# Altium PCB gokart_pcb.PcbDoc
Units mm, origin at the board's own origin, x right, y up, seen from the top; angles counter-clockwise.
Board outline 90 x 66 mm, 2 copper layers (Top Layer, Bottom Layer); 70 components, 37 nets, 174 pads, 0 vias.
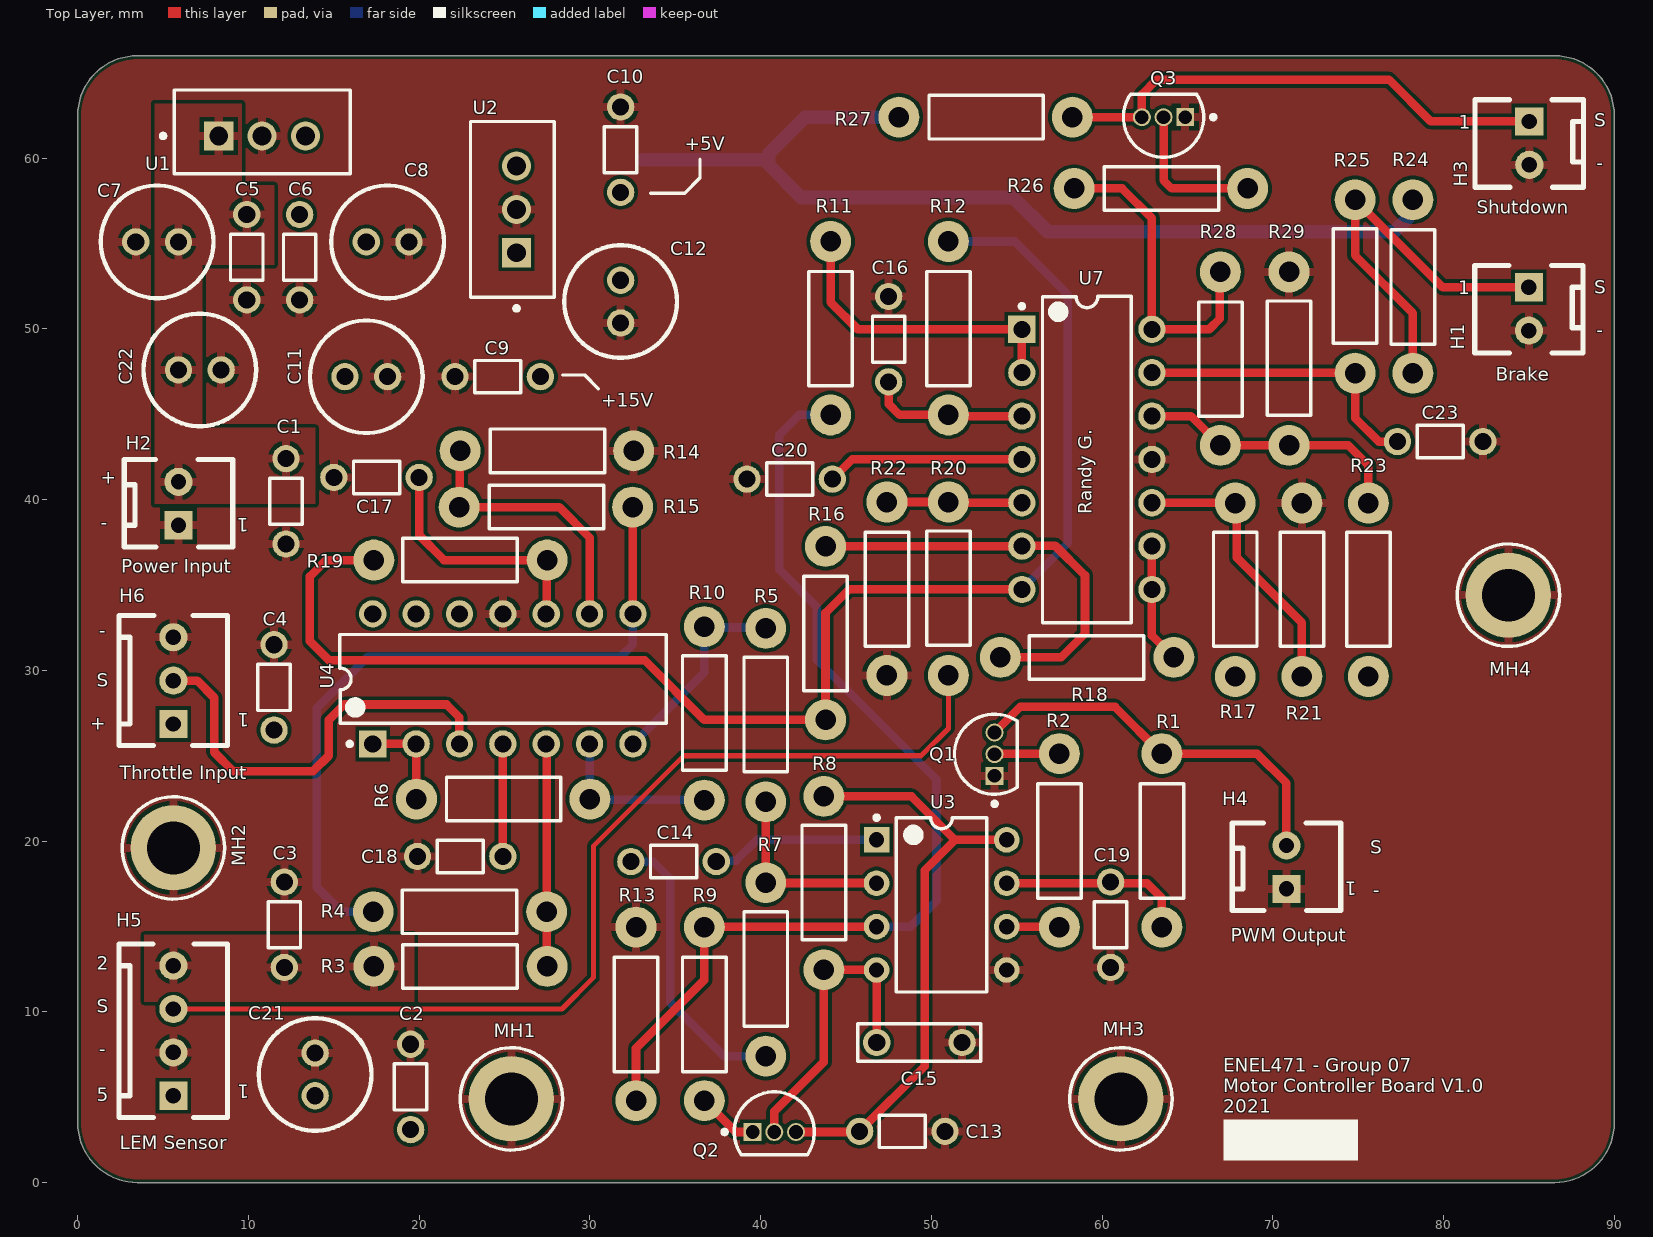
[diagram p0: Top Layer view]
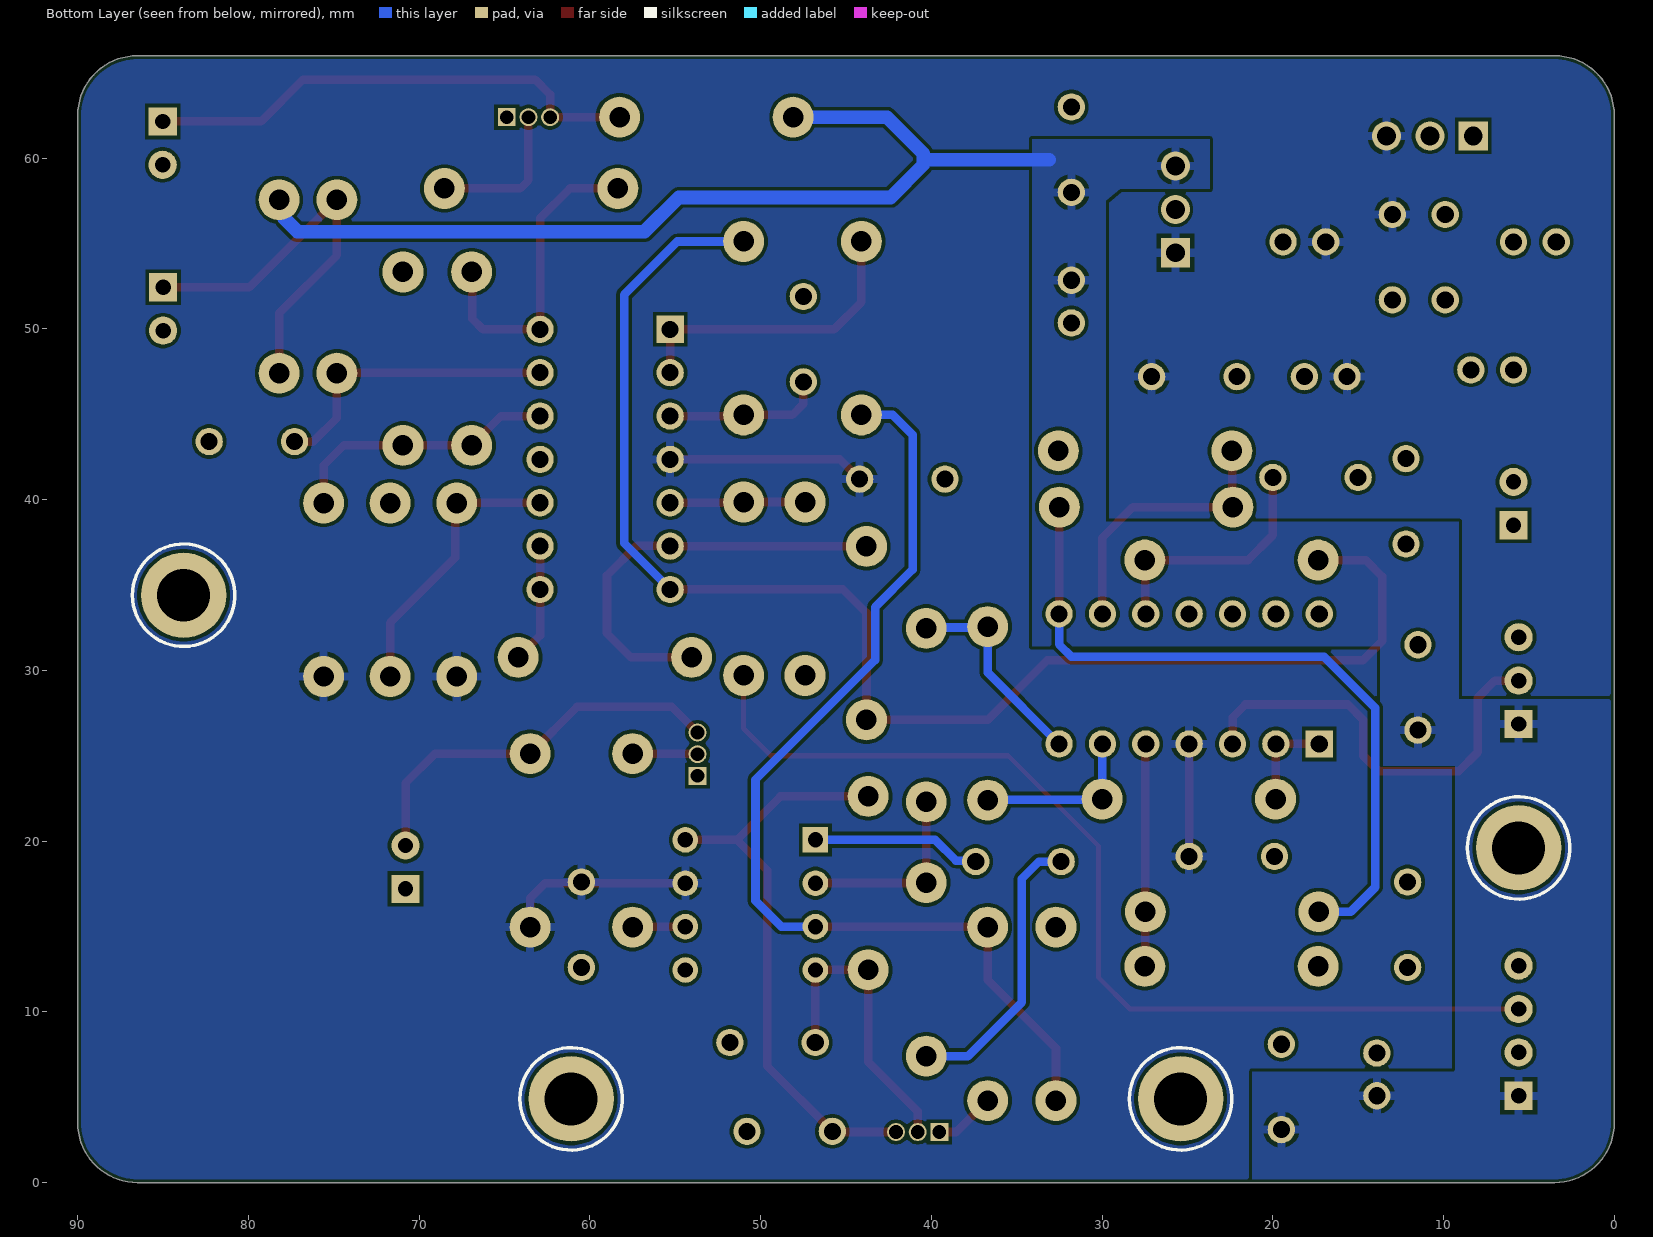
[diagram p1: Bottom Layer view, seen from below]
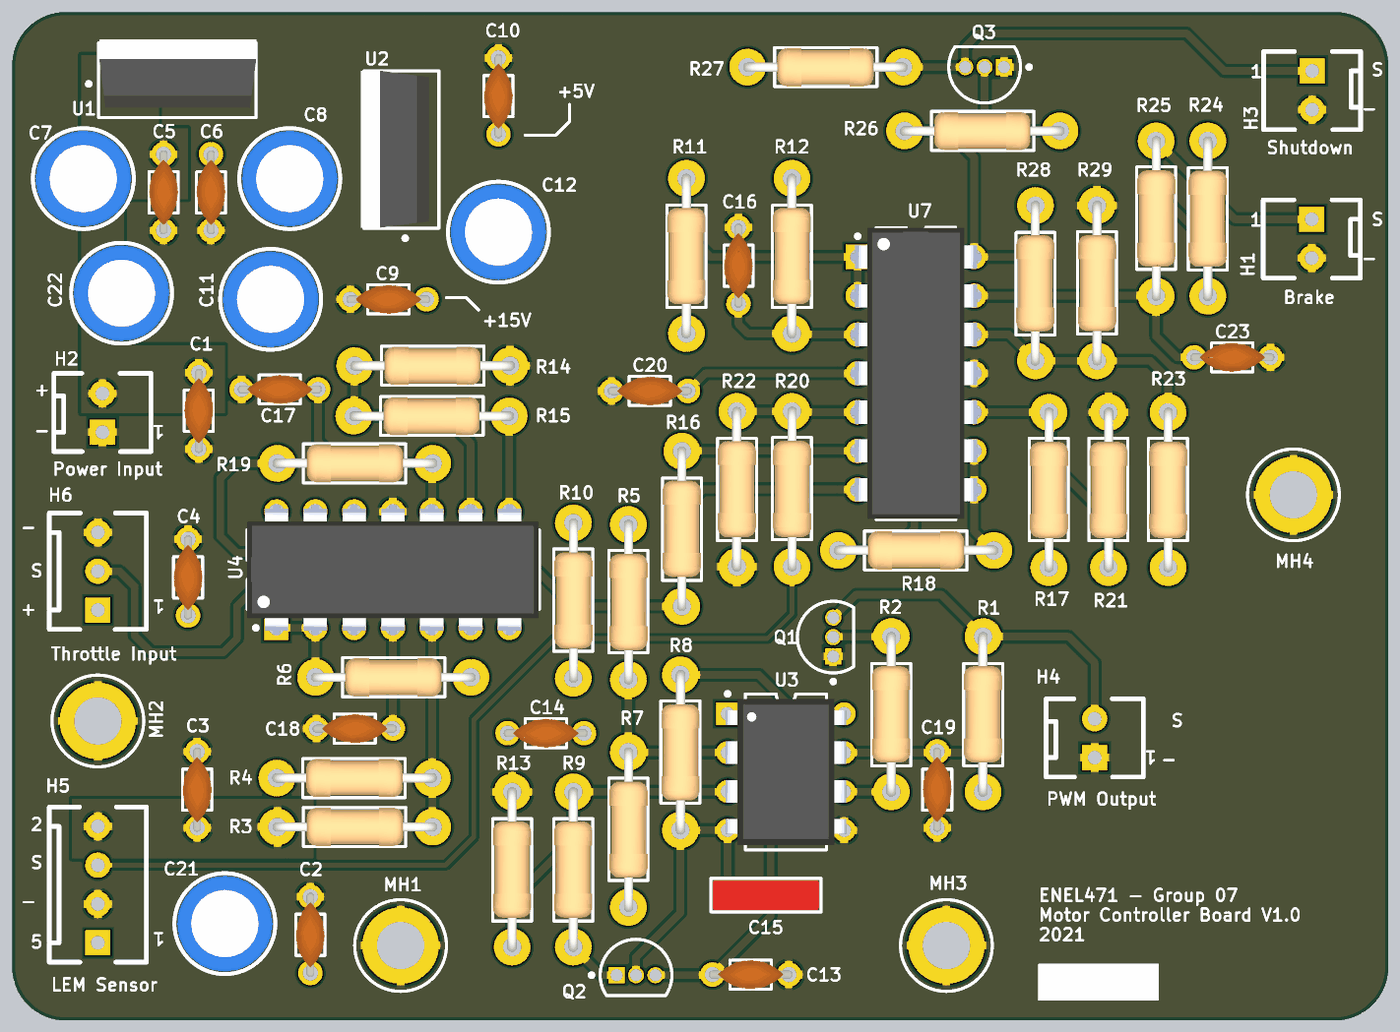
[diagram p2: 3D render of the assembled board from above, using the file's embedded part models]

## Layer stack, top to bottom
Top Solder: solder mask 0.0102, Solder Resist, Dk 3.5
Top Layer: signal copper 0.0356
Dielectric 1: dielectric 0.32, FR-4, Dk 4.8
Bottom Layer: signal copper 0.0356
Bottom Solder: solder mask 0.0102, Solder Resist, Dk 3.5

## Board outline
0,3.5 0,62.5 -0.001,62.5 cw(c3.5,62.5) 3.5,66.001 3.5,66 86.5,66 86.5,66.001 cw(c86.5,62.5) 90.001,62.5 90,62.5 90,3.5 90.001,3.5 cw(c86.5,3.5) 86.5,-0.001 86.5,0 3.5,0 3.5,-0.001 cw(c3.5,3.5)

## Design rules (kind name [scope] priority, off if disabled: settings)
BoardOutlineClearance [All] p1: gap=0.2 ignorepadtopadclearanceinfootprint=FALSE except(0.4: Arc-SplitBarrior Arc-SplitContinuation Track-SplitBarrior Track-SplitContinuation SMDPad-SplitBarrior SMDPad-SplitContinuation THPad-SplitBarrior THPad-SplitContinuation Via-SplitBarrior Via-SplitContinuation Fill-SplitBarrior Fill-SplitContinuation Poly-SplitBarrior Poly-SplitContinuation Region-SplitBarrior Region-SplitContinuation Text-SplitBarrior Text-SplitContinuation)
Clearance "Clearance Bottom Layer" [OnLayer('Bottom Layer')] p1: gap=0.203 ignorepadtopadclearanceinfootprint=TRUE except(0.254: Arc-Text Track-Text SMDPad-Text THPad-Text Via-Text Fill-Text Poly-Text Region-Text Text-Text)
Clearance "Clearance Top Layer" [OnLayer('Top Layer')] p2: gap=0.203 ignorepadtopadclearanceinfootprint=TRUE except(0.254: Arc-Text Track-Text SMDPad-Text THPad-Text Via-Text Fill-Text Poly-Text Region-Text Text-Text)
Clearance [All] p3: gap=0.2 ignorepadtopadclearanceinfootprint=FALSE except(0.089: Arc-Arc Arc-Track Arc-SMDPad Track-Track Track-SMDPad SMDPad-SMDPad; 0.127: Arc-Via Track-Via SMDPad-Via THPad-Via Via-Via; 0.254: Arc-Text Track-Text SMDPad-Text THPad-Text Via-Text Fill-Text Poly-Text Region-Text Text-Text)
HoleSize [All] p1: absolutevalues=TRUE maxlimit=6.3 minlimit=0.2 maxpercent=80.000 minpercent=20.000
MinimumAnnularRing [All] p1: minimumring=0.076
MinimumSolderMaskSliver [All] p1: minsoldermaskwidth=0.1
PolygonConnect [All] p1: connectstyle=Relief reliefconductorwidth=0.5 reliefentries=4 polygonreliefangle="90 Angle" airgapwidth=0.254
RoutingCorners [All] p1: cornerstyle=Round minsetback=2.54 maxsetback=2.54
RoutingVias [All] p1: holewidth=0.5 width=1 viastyle="Through Hole" minholewidth=0.2 minwidth=0.45 maxholewidth=1 maxwidth=2
SilkToSilkClearance [All] p1: silktosilkclearance=0.1
SilkToSolderMaskClearance [IsPad] p1: minsilkscreentomaskgap=0.1 clearancetoexposedcopper=TRUE
SolderMaskExpansion [All] p1: expansion=0.102 istentingtop=FALSE
Width [All] p1: maxlimit=2.54 minlimit=0.089 preferedwidth=0.381
25 further rules are at their usual default settings.

## Classes and differential pairs
component class U_power: C5 C6 C7 C8 C9 C10 C11 C12 U1 U2
component class U_controller: C13 C14 C15 C16 C17 C18 C19 C20 Q1 Q2 R1 R2 R3 R4 R5 R6 R7 R8 R9 R10 R11 R12 R13 R14 R15 R16 R17 R18 R19 R20 R21 R22 U3 U4 U7
component class gokart_top: C1 C2 C3 C4 C21 C22 C23 H1 H2 H3 H4 H5 H6 MH1 MH2 MH3 MH4 Q3 R23 R24 R25 R26 R27 R28 R29

## Components (designator, comment, footprint, x,y, rotation, side; value= is the part's Value field where it differs from the comment)
C1 "F" CAP_CER_2.50 12.2,39.9 r90 top
C2 "F" CAP_CER_2.50 19.5,5.6 r270 top
C3 "F" CAP_CER_2.50 12.1,15.1 r270 top
C4 "F" CAP_CER_2.50 11.5,29 r270 top
C5 "F" CAP_CER_2.50 9.9,54.2 r90 top
C6 "F" CAP_CER_2.50 13,54.2 r90 top
C7 "F" CAP_ELEC_2.50 4.65,55.1 r180 top
C8 "F" CAP_ELEC_2.50 18.15,55.1 r0 top
C9 "F" CAP_CER_2.50 24.6,47.2 r0 top
C10 "F" CAP_CER_2.50 31.8,60.5 r270 top
C11 "F" CAP_ELEC_2.50 16.9,47.2 r0 top
C12 "F" CAP_ELEC_2.50 31.8,51.6 r270 top
C13 "F" CAP_CER_2.50 48.3,3 r180 top
C14 "F" CAP_CER_2.50 34.9,18.8 r0 top
C15 "F" CAP_FILM_10.0 49.3,8.2 r180 top
C16 "F" CAP_CER_2.50 47.5,49.4 r270 top
C17 "F" CAP_CER_2.50 17.5,41.3 r0 top
C18 "F" CAP_CER_2.50 22.4,19.1 r0 top
C19 "F" CAP_CER_2.50 60.5,15.1 r90 top
C20 "F" CAP_CER_2.50 41.7,41.2 r0 top
C21 "F" CAP_ELEC_2.50 13.907,6.332 r90 top
C22 "F" CAP_ELEC_2.50 7.15,47.6 r0 top
C23 "F" CAP_CER_2.50 79.8,43.4 r180 top
H1 "2 Pin Molex KK HDR" MOLEX_KK_2_HDR 85,52.44 r270 top
H2 "2 Pin Molex KK HDR" MOLEX_KK_2_HDR 5.9,38.5 r90 top
H3 "2 Pin Molex KK HDR" MOLEX_KK_2_HDR 85.025,62.15 r270 top
H4 "2 Pin Molex KK HDR" MOLEX_KK_2_HDR 70.8,17.2 r90 top
H5 "4 Pin Molex KK Hdr" MOLEX_KK_4_HDR 5.6,5.08 r90 top
H6 "3 Pin Molex KK Hdr" MOLEX_KK_3_HDR 5.6,26.86 r90 top
MH1 "M3" M3-Mounting-Hole 25.4,4.9 r0 top
MH2 "M3" M3-Mounting-Hole 5.6,19.6 r0 top
MH3 "M3" M3-Mounting-Hole 61.1,4.9 r0 top
MH4 "M3" M3-Mounting-Hole 83.8,34.4 r0 top
Q1 "2N3904" ONSC-TO-92-3-29-04_AD 53.7,25.09 r90 top
Q2 "2N3904" ONSC-TO-92-3-29-04_AD 40.8,2.96 r0 top
Q3 "2N3904" ONSC-TO-92-3-29-04_AD 63.6,62.4 r180 top
R1 "k" RESISTOR_THROUGH_HOLE 63.5,14.96 r90 top
R2 "k" RESISTOR_THROUGH_HOLE 57.5,14.96 r90 top
R3 "k" RESISTOR_THROUGH_HOLE 17.34,12.66 r0 top
R4 "k" RESISTOR_THROUGH_HOLE 17.31,15.86 r0 top
R5 "k" RESISTOR_THROUGH_HOLE 40.3,32.46 r270 top
R6 "k" RESISTOR_THROUGH_HOLE 30,22.46 r180 top
R7 "k" RESISTOR_THROUGH_HOLE 40.3,17.56 r270 top
R8 "k" RESISTOR_THROUGH_HOLE 43.7,22.62 r270 top
R9 "k" RESISTOR_THROUGH_HOLE 36.7,4.8 r90 top
R10 "k" RESISTOR_THROUGH_HOLE 36.7,32.56 r270 top
R11 "k" RESISTOR_THROUGH_HOLE 44.1,44.96 r90 top
R12 "k" RESISTOR_THROUGH_HOLE 51,44.96 r90 top
R13 "k" RESISTOR_THROUGH_HOLE 32.7,4.8 r90 top
R14 "k" RESISTOR_THROUGH_HOLE 32.56,42.86 r180 top
R15 "k" RESISTOR_THROUGH_HOLE 32.5,39.56 r180 top
R16 "k" RESISTOR_THROUGH_HOLE 43.8,27.1 r90 top
R17 "k" RESISTOR_THROUGH_HOLE 67.8,39.8 r270 top
R18 "k" RESISTOR_THROUGH_HOLE 54.04,30.76 r0 top
R19 "k" RESISTOR_THROUGH_HOLE 17.34,36.46 r0 top
R20 "k" RESISTOR_THROUGH_HOLE 51,39.86 r270 top
R21 "k" RESISTOR_THROUGH_HOLE 71.7,39.8 r270 top
R22 "k" RESISTOR_THROUGH_HOLE 47.4,29.7 r90 top
R23 "k" RESISTOR_THROUGH_HOLE 75.6,39.8 r270 top
R24 "k" RESISTOR_THROUGH_HOLE 78.2,47.405 r90 top
R25 "k" RESISTOR_THROUGH_HOLE 74.82,57.565 r270 top
R26 "k" RESISTOR_THROUGH_HOLE 68.525,58.225 r180 top
R27 "k" RESISTOR_THROUGH_HOLE 58.26,62.4 r180 top
R28 "k" RESISTOR_THROUGH_HOLE 66.925,43.175 r90 top
R29 "k" RESISTOR_THROUGH_HOLE 70.95,53.335 r270 top
U1 "LM7815" ONSC-TO-220-3-221A-09 10.8,61.3 r90 top
U2 "LM7805" ONSC-TO-220-3-221A-09 25.7,57 r180 top
U3 "UC3843N" UC3843N 50.6,16.26 r0 top
U4 "LMC6484" TI-J14 24.9,29.5 r90 top
U7 "LMC6484" TI-J14 59.11,42.355 r0 top

## Footprints (in the part's own frame and the unit in brackets; to place one, negate y for a bottom-side part, rotate by r counter-clockwise, add the part's x,y. Pads: shape width x height; smd on the part's side, far side on the other; paste and mask are expansions set on the pad)
CAP_CER_2.50 [mm]
  round 1.6 hole 1: 1(-2.5,0) 2(2.5,0)
  silkscreen extent -1.35,-0.95 1.35,0.95, body extent -2.75,-0.95 2.75,0.95, height 4.4
CAP_ELEC_2.50 [mm]
  round 1.6 hole 1: 1(-1.25,0) 2(1.25,0)
  silkscreen extent -3.3,-3.3 3.3,3.3, body extent -3.15,-3.15 3.15,3.15, height 7.1
CAP_FILM_10.0 [mm]
  round 1.6 hole 1: 1(-2.5,0) 2(2.5,0)
  silkscreen extent -3.6,-1.1 3.6,1.1, body extent -3.5,-1 3.5,1, height 10.01
M3-Mounting-Hole [mm]
  round 5 hole 3.1: 1(0,0)
  silkscreen extent -3,-3 3,3
MOLEX_KK_2_HDR [mil] "MOLEX_KK_2_HDR"
  rect 65x65 hole 35.43: 1(0,0)
  round 65 hole 35.43: 2(100,0)
  silkscreen extent -50,-125 152,125, body extent -44,-121 146,119, height 630
MOLEX_KK_3_HDR [mil] "MOLEX_KK_3_HDR"
  rect 65x65 hole 35.43: 1(0,0)
  round 65 hole 35.43: 2(100,0) 3(200,0)
  silkscreen extent -50,-125 250,125, body extent -44,-120 244,119, height 630
MOLEX_KK_4_HDR [mil] "MOLEX_KK_4_HDR"
  rect 65x65 hole 35.43: 1(0,0)
  round 65 hole 35.43: 2(100,0) 3(200,0) 4(300,0)
  silkscreen extent -50,-125 350,125, body extent -44,-119 343,119, height 630
ONSC-TO-92-3-29-04_AD [mm] "TO, 3-Leads, Body Dia 4.7mm, Pitch 1.27mm"
  rect 1.05x1.05 hole 0.8: 1(-1.27,0)
  round 1.05 hole 0.8: 2(0,0) 3(1.27,0)
  silkscreen extent -3.04,-1.34 2.35,2.35, body extent -2.36,-1.34 2.35,2.36, height 7.87
ONSC-TO-220-3-221A-09 [mm] "FM, 3-Leads, Body 10.3x4.85mm, Pitch 2.54mm"
  rect 1.7x1.7 hole 1.1: 1(0,2.54)
  round 1.7 hole 1.1: 2(0,0) 3(0,-2.54)
  silkscreen extent -2.2,-5.15 2.7,5.92, body extent -1.55,-5.16 2.9,5.11, height 19.16
RESISTOR_THROUGH_HOLE [mm]
  round 2.4 hole 1.2: 1(0,0) 2(10.16,0)
  silkscreen extent 1.7,-1.28 8.4,1.28, body extent -0.3,-1.24 10.45,1.25, height 2.5
TI-J14 [mm] "DIP, 14-Leads, Body 19.94x6.92mm, Row Spacing 7.62 mm, Pitch 2.54mm"
  rect 1.6x1.6 hole 1: 1(-3.81,7.62)
  round 1.6 hole 1: 2(-3.81,5.08) 3(-3.81,2.54) 4(-3.81,0) 5(-3.81,-2.54) 6(-3.81,-5.08) 7(-3.81,-7.62) 8(3.81,-7.62) 9(3.81,-5.08) 10(3.81,-2.54) 11(3.81,0) 12(3.81,2.54) 13(3.81,5.08) 14(3.81,7.62)
  silkscreen extent -3.93,-9.57 2.6,9.55, body extent -4.25,-9.52 4.25,9.53, height 5.43
UC3843N [mm] "DIP, 8-Leads, Row Spacing 7.62mm, Pitch 2.54mm, Body 9.6x6.4mm"
  rect 1.5x1.5 hole 0.9: 1(-3.81,3.81)
  round 1.5 hole 0.9: 2(-3.81,1.27) 3(-3.81,-1.27) 4(-3.81,-3.81) 5(3.81,-3.81) 6(3.81,-1.27) 7(3.81,1.27) 8(3.81,3.81)
  silkscreen extent -3.93,-5.1 2.65,5.23, body extent -3.94,-4.79 3.94,4.79, height 5.18

## Part data
C1 C2 C3 C4 C5 C6 C9 C10 C13 C14 C16 C17 C18 C19 C20 C23: library part CAP_CER
C7 C8 C11 C12 C21 C22: library part CAP_ELEC
C15: library part CAP_FILM
H1 H2 H3 H4: library part JA_MOLEX_KK_2POS, "CONN HEADER 2POS 2.54mm VERT_Thru Hole", Supplier Part Number 1=1462926, Storage Location="ECE Dept Store", Supplier="ECE Dept", Supplier 1=Farnell
H5: library part JA_MOLEX_KK_4POS, "CONN HEADER 4POS 2.54mm VERT_Thru Hole", Manufacturer=Molex, Manufacturer PN=22-23-2041, Supplier Part Number 1=9731164, Storage Location="ECE Dept Store", Supplier="ECE Dept", Supplier 1=Farnell
H6: library part JA_MOLEX_KK_3POS, "CONN HEADER 3POS 2.54mm VERT_Thru Hole", Manufacturer=Molex, Manufacturer PN=22-23-2031, Supplier Part Number 1=9731156, Storage Location="ECE Dept Store", Supplier="ECE Dept", Supplier 1=Farnell
MH1 MH2 MH3 MH4: library part M3-Mounting-Hole
R1 R2 R3 R4 R5 R6 R7 R8 R9 R10 R11 R12 R13 R14 R15 R16 R17 R18 R19 R20 R21 R22 R23 R24 R25 R26 R27 R28 R29: library part Resistor
U3: "PWM Controller with Current Control, 100 % Duty Cycle, 0 to +70 degC, 8-pin PDIP (P), Green (RoHS & no Sb/Br)", Frequency(Max)(kHz)=450, Manufacturer="Texas Instruments", Rating=Catalog, Supplier Part Number 1=296-11288-5-ND, Code_JEDEC=MS-001-BA, ComponentLink1Description=Datasheet, ComponentLink1URL=http://www.ti.com/general/docs/lit/getliterature.tsp?genericPartNumber=UC3843&fileType=pdf, Control Method=Current, DatasheetVersion=SLUS223C, Duty Cycle(Max)(%)=100, Eco-Plan="Green (RoHS & no Sb/Br)", Mounting Technology="Through Hole", PackageDescription="8-Pin Plastic Dual-In-Line Package, Row Spacing 7.62 mm, Pitch 2.54 mm", PackageReference=P8, PackageVersion="revE, Apr-2010", PartNumber=UC3843N, Regulated Outputs(#)=1, SubFamily="PWM Controller", Supplier 1=Digi-Key, Supplier 2=Farnell, Supplier 3=Newark, Supplier 4=Mouser, Supplier Part Number 2=2164381, Supplier Part Number 3=74K4014, Supplier Part Number 4=595-UC3843N, Topology="Boost, Buck, Flyback, Forward", UVLO Thresholds On/Off(V)=8.4/7.6
Q1 Q2 Q3: ComponentLink1Description="Manufacturer URL", ComponentLink1URL=http://www.onsemi.com/, ComponentLink2Description=Datasheet, ComponentLink2URL=http://www.onsemi.com/pub_link/Collateral/BC549B-D.PDF, ComponentLink3Description="Package Specification", ComponentLink3URL=http://www.onsemi.com/pub_link/Collateral/BC549B-D.PDF
U1 U2: ComponentLink1Description="Manufacturer URL", ComponentLink1URL=http://www.onsemi.com/, ComponentLink2Description=Datasheet, ComponentLink2URL=http://www.onsemi.com/pub_link/Collateral/NTD5862N-D.PDF, ComponentLink3Description="Package Specification", ComponentLink3URL=http://www.onsemi.com/pub_link/Collateral/221A-09.PDF
U4 U7: ComponentLink1Description="Manufacturer URL", ComponentLink1URL=http://www.ti.com/, ComponentLink2Description=Datasheet, ComponentLink2URL=http://www.ti.com/lit/ds/symlink/tl064m.pdf, ComponentLink3Description="Package Specification", ComponentLink3URL=http://www.ti.com/litv/pdf/mcer002d

## Nets (pads, with @x,y where several pads share a name; then routed paths per layer and width w, separated by ;. In a path a pad name is that pad's centre, name@x,y a point inside that pad or via, vN(x,y) a via of type N, cw(c..) or ccw(c..) an arc to the next point about the centre after c; other vN are vias at no path point)
2V5: C3.2 H5.4 R3.1
5V: C2.2 C4.2 C10.2 C12.1 C21.1 H5.1 H6.1 R24.2 R27.2 U2.3 | length 57.1
  Bottom Layer w0.8: 33.1,59.9 40.474,59.9 ; R27.2 42.6,62.4 40.474,60.274 40.474,59.611 42.384,57.7 54.8,57.7 56.8,55.7 77.134,55.7 77.894,56.46 77.894,57.259 R24.2
15V: C6.2 C8.1 C9.2 C11.1 C18.2 C19.2 C20.2 R1.1 R17.2 R23.2 U1.3 U2.1 U3.7 U4.4 U7.4 | length 29.1
  Top Layer w0.5: C18.2 U4.4@24.9,25.25 ; C20.2 45.355,42.355 U7.4 ; C20.2@44.25,41.16 C20.2@44.442,41.16 ; U3.7 62.63,17.53 63.5,16.66 R1.1
24V: C1.2 C5.2 C7.1 C22.1 H2.2 U1.1
GND: C1.1 C2.1 C3.1 C4.1 C5.1 C6.1 C7.2 C8.2 C9.1 C10.1 C11.2 C12.2 C13.1 C15.1 C16.1 C17.1 C18.1 C19.1 C20.1 C21.2 C22.2 C23.1 H1.2 H2.1 H3.2 H4.1 H5.2 H6.3 MH1.1 MH2.1 MH3.1 MH4.1 Q1.1 Q3.1 R13.2 R14.1 R21.1 R22.1 R29.1 U1.2 U2.2 U3.5 U4.11 U7.11
NetC14_1: C14.1 R7.2 | length 16.9
  Bottom Layer w0.5: C14.1 33.7,18.8 34.7,17.8 34.7,10.56 37.86,7.4 R7.2
NetC14_2: C14.2 U3.1 | length 9.9
  Bottom Layer w0.5: C14.2@37.4,18.86 38.56,18.86 39.77,20.07 U3.1
NetC16_2: C16.2 R12.1 U7.3 | length 9.5
  Top Layer w0.5: C16.2 47.5,45.6 48.14,44.96 R12.1 ; R12.1@50.95,45.01 51.065,44.895 U7.3
NetC17_2: C17.2 R19.2 U4.10 | length 15.1
  Top Layer w0.5: C17.2 20,37.91 21.45,36.46 R19.2 27.47,36.43 27.47,33.34 U4.10 U4.10@27.44,32.87
NetC23_2: C23.2 R25.2 U7.13 | length 17.6
  Top Layer w0.5: U7.13 74.79,47.435 R25.2 74.82,44.78 76.2,43.4 C23.2
NetH1_1: H1.1 R24.1 R25.1 | length 23.9
  Top Layer w0.5: R24.1 78.2,50.925 74.82,54.305 R25.1 79.945,52.44 H1.1
NetH3_1: H3.1 Q3.3 R27.1 | length 29.5
  Top Layer w0.5: R27.1 Q3.3 62.33,63.73 63.2,64.6 76.8,64.6 79.25,62.15 H3.1
NetQ1_2: Q1.2 R2.2 | length 3.8
  Top Layer w0.5: Q1.2 53.715,25.105 57.485,25.105 R2.2
NetQ2_1: Q2.1 R9.1 | length 3.6
  Top Layer w0.5: R9.1 38.54,2.96 Q2.1
NetQ3_2: Q3.2 R26.1 | length 8.8
  Top Layer w0.5: Q3.2 63.6,58.694 64.069,58.225 R26.1
NetR2_1: R2.1 U3.6 | length 3.2
  Top Layer w0.5: U3.6@54.31,14.99 U3.6 54.425,14.975 57.485,14.975 R2.1
NetR3_2: R3.2 R4.2 U4.5 | length 12.6
  Top Layer w0.5: U4.5@27.44,25.25 27.47,25.22 R4.2 27.485,15.845 27.485,12.675 R3.2
NetR4_1: R4.1 R15.1 U4.8 | length 42.5
  Top Layer w0.5: R15.1 32.51,39.55 32.51,33.32 U4.8
  Bottom Layer w0.5: R4.1 15.44,15.86 14,17.3 14,27.8 17,30.8 31.8,30.8 32.52,31.52 U4.8
NetR5_1: R5.1 R10.1 U4.7 | length 12.2
  Top Layer w0.5: R10.1 R10.1@36.75,32.51 ; R5.1@40.25,32.51 R5.1
  Bottom Layer w0.5: U4.7 36.7,29.87 R10.1 ; R10.1@36.75,32.51 R5.1@40.25,32.51
NetR5_2: R5.2 R7.1 U3.2 | length 11.1
  Top Layer w0.5: R5.2 R7.1 40.315,17.545 46.675,17.545 U3.2@46.69,17.53
NetR6_1: R6.1 R10.2 U4.6 | length 9.5
  Bottom Layer w0.5: U4.6@29.98,25.25 29.99,25.24 29.99,22.47 R6.1 30.03,22.43 36.67,22.43 R10.2
NetR6_2: R6.2 U4.1 U4.2 | length 5.3
  Top Layer w0.5: U4.1 U4.2 ; U4.2@19.82,25.25 19.83,25.24 19.83,22.47 R6.2
NetR9_2: R9.2 R11.1 R13.1 U3.3 | length 60.5
  Top Layer w0.5: R13.1 32.7,7.86 36.7,11.86 R9.2 36.715,14.975 46.675,14.975 U3.3@46.69,14.99
  Bottom Layer w0.5: R11.1 42.26,44.96 41.1,43.8 41.1,35.9 43.3,33.7 43.3,30.6 50.3,23.6 50.3,16.5 48.79,14.99 U3.3
NetR11_2: R11.2 U7.1 U7.2 | length 18
  Top Layer w0.5: R11.2 44.1,51.56 45.685,49.975 U7.1 U7.2
NetR12_2: R12.2 R16.1 R19.1 U7.7 | length 85
  Top Layer w0.5: R19.1 14.56,36.46 13.6,35.5 13.6,31.7 14.7,30.6 33.2,30.6 36.7,27.1 R16.1 43.8,33.36 45.2,34.76 U7.7@55.3,34.76
  Bottom Layer w0.5: R12.2 54.88,55.12 58,52 58,37.46 U7.7@55.3,34.76
NetR14_2: R14.2 R15.2 U4.9 | length 16.2
  Top Layer w0.5: R14.2 22.37,42.83 22.37,39.59 R15.2 28.2,39.56 29.98,37.78 U4.9
NetR16_2: R16.2 R18.1 U7.6 | length 24.9
  Top Layer w0.5: R16.2 43.82,37.28 55.28,37.28 55.3,37.3 57.26,37.3 59,35.56 59,32.16 57.6,30.76 R18.1
NetR17_1: R17.1 R21.2 U7.10 | length 16.7
  Top Layer w0.5: U7.10 62.928,39.807 67.792,39.807 R17.1 67.9,39.7 67.9,36.6 71.7,32.8 R21.2
NetR18_2: R18.2 U7.8 U7.9 | length 7
  Top Layer w0.5: U7.9 U7.8 62.92,32.04 R18.2
NetR20_1: R20.1 R22.2 U7.5 | length 7.9
  Top Layer w0.5: R22.2 R20.1 51.045,39.815 U7.5
NetR23_1: R23.1 R28.1 R29.2 U7.12 | length 16.1
  Top Layer w0.5: U7.12 65.205,44.895 R28.1 R29.2 74.425,43.175 75.6,42 R23.1 ; R29.2@70.95,42.575 R29.2@70.962,42.563
NetR26_2: R26.2 R28.2 U7.14 | length 18.8
  Top Layer w0.5: R26.2 61.175,58.225 62.92,56.48 U7.14 66.275,49.975 66.9,50.6 66.9,53.31 R28.2
PWM_OUT: H4.2 Q1.3 R1.2 | length 23.2
  Top Layer w0.5: Q1.3 55.2,27.86 60.76,27.86 R1.2 69.08,25.12 70.8,23.4 H4.2
Rt/Ct: C15.2 Q2.2 R8.2 U3.4 | length 17.9
  Top Layer w0.5: Q2.2 40.8,4.16 43.7,7.06 R8.2 43.705,12.455 46.685,12.455 U3.4@46.69,12.45 ; U3.4 46.795,12.445 C15.2@46.795,8.2
THR: H6.2 U4.3 | length 25.5
  Top Layer w0.5: H6.2 7,29.4 8,28.4 8,25.2 9.1,24.1 13.8,24.1 14.7,25 14.7,27.1 15.6,28 21.6,28 22.36,27.24 U4.3
V_LEM: H5.3 R20.2 | length 59.8
  Top Layer w0.3: H5.3 28.36,10.16 30.2,12 30.2,19.7 35.5,25 49.4,25 51,26.6 R20.2
VREF: C13.2 Q2.3 R8.1 U3.8 | length 34.8
  Top Layer w0.5: Q2.3 45.76,2.96 C13.2 49.6,6.8 49.6,18.28 51.39,20.07 ; R8.1 48.84,22.62 51.39,20.07 ; U3.8@54.31,20.07 51.39,20.07
pads on no net: U4.12 U4.13 U4.14

## Polygon pours and split planes (outlines as drawn)
GND on Top Layer "GND_L01_P005" (solid, pour order 5): 0,0 0,66 90,66 90,0
2V5 on Top Layer "2V5_L01_P001" (solid, pour order 1): 3.9,10.6 3.9,14.5 19.7,14.5 19.7,10.6
24V on Top Layer "24V_L01_P000" (solid, pour order 0): 13.9,44.2 7.3,44.2 7.3,53.75 11.5,53.75 11.5,58.4 9.6,58.4 9.6,63.2 4.5,63.2 4.5,39.75 13.9,39.75
15V on Bottom Layer "15V_L02_P004" (solid, pour order 4): 0,0 0,66 90,66 90,0
5V on Bottom Layer "5V_L02_P003" (solid, pour order 3): 9.3,6.6 9.4,6.5 21.2,6.5 21.2,0 0,0 0,28.3 9.1,28.3 9.1,38.7 29.8,38.7 29.8,57.495 28.929,58.2 23.7,58.2 23.7,61.1 34.1,61.1 34.1,31.4 13.7,31.4 13.7,24.4 9.3,24.4

## Silkscreen, mask and mechanical layers (free items; w line width, h text height)
Top Overlay:
  rectangle: 67.1,1.3 75,3.7
  lines w0.2: 28.4,47.3 29.7,47.3 30.5,46.5 ; 33.55,57.95 35.55,57.95 36.45,58.85 36.45,59.95
  text "S" at 88.817,61.85 h0.8
  text "+5V" at 35.55,60.45 h0.8
  text "-" at 89.35,59.95 h0.8 r180
  text "Shutdown" at 81.95,56.75 h0.8
  text "S" at 88.817,52.05 h0.8
  text "-" at 89.35,50.15 h0.8 r180
  text "Brake" at 83.05,46.95 h0.8
  text "+15V" at 30.65,45.45 h0.8
  text "+" at 1.35,40.917 h0.8
  text "Randy G." at 59.383,39.15 h0.8 r90
  text "-" at 1.35,38.25 h0.8
  text "Power Input" at 2.55,35.717 h0.8
  text "-" at 1.65,32.55 h0.8 r180
  text "S" at 1.117,29.05 h0.8
  text "+" at 1.65,27.183 h0.8 r180
  text "Throttle Input" at 2.45,23.617 h0.8
  text "S" at 75.717,19.25 h0.8
  text "-" at 76.25,17.35 h0.8 r180
  text "PWM Output" at 67.55,14.117 h0.8
  text "2" at 1.117,12.45 h0.8
  text "S" at 1.117,9.95 h0.8
  text "-" at 1.65,8.05 h0.8 r180
  text "5" at 1.117,4.75 h0.8
  text "ENEL471 - Group 07 / Motor Controller Board V1.0 / 2021" at 67.1,4.1 h0.8
  text "LEM Sensor" at 2.45,1.95 h0.8
Mechanical 1:
  lines w0.2: -0.001,3.5 ccw(c3.5,3.5) 3.5,-0.001 ; -0.001,62.5 cw(c3.5,62.5) 3.5,66.001 ; 0,3.5 0,62.5 ; 3.5,0 86.5,0 ; 3.5,66 86.5,66 cw(c86.5,62.5) 90.001,62.5 ; 86.5,-0.001 ccw(c86.5,3.5) 90.001,3.5 ; 90,3.5 90,62.5

## Dimensions
0,0 to 3.5,66 on Mechanical 13
0,0 to 90,3.5 on Mechanical 13

## Text inside footprints (layer, text, board x,y; h text height)
H1: Top Overlay "1" at 80.873,52.026 h0.8
H2: Top Overlay "1" at 10.027,38.914 h0.8 r180
H3: Top Overlay "1" at 80.898,61.736 h0.8
H4: Top Overlay "1" at 74.927,17.614 h0.8 r180
H5: Top Overlay "1" at 10.045,5.715 h0.8 r180
H6: Top Overlay "1" at 10.045,27.495 h0.8 r180